# Altium PCB PCB.PcbDoc
Units mm, origin at the board's own origin, x right, y up, seen from the top; angles counter-clockwise.
Board outline 67.31 x 21.59 mm, 2 copper layers (Top Layer, Bottom Layer); 12 components, 4 nets, 20 pads, 0 vias.
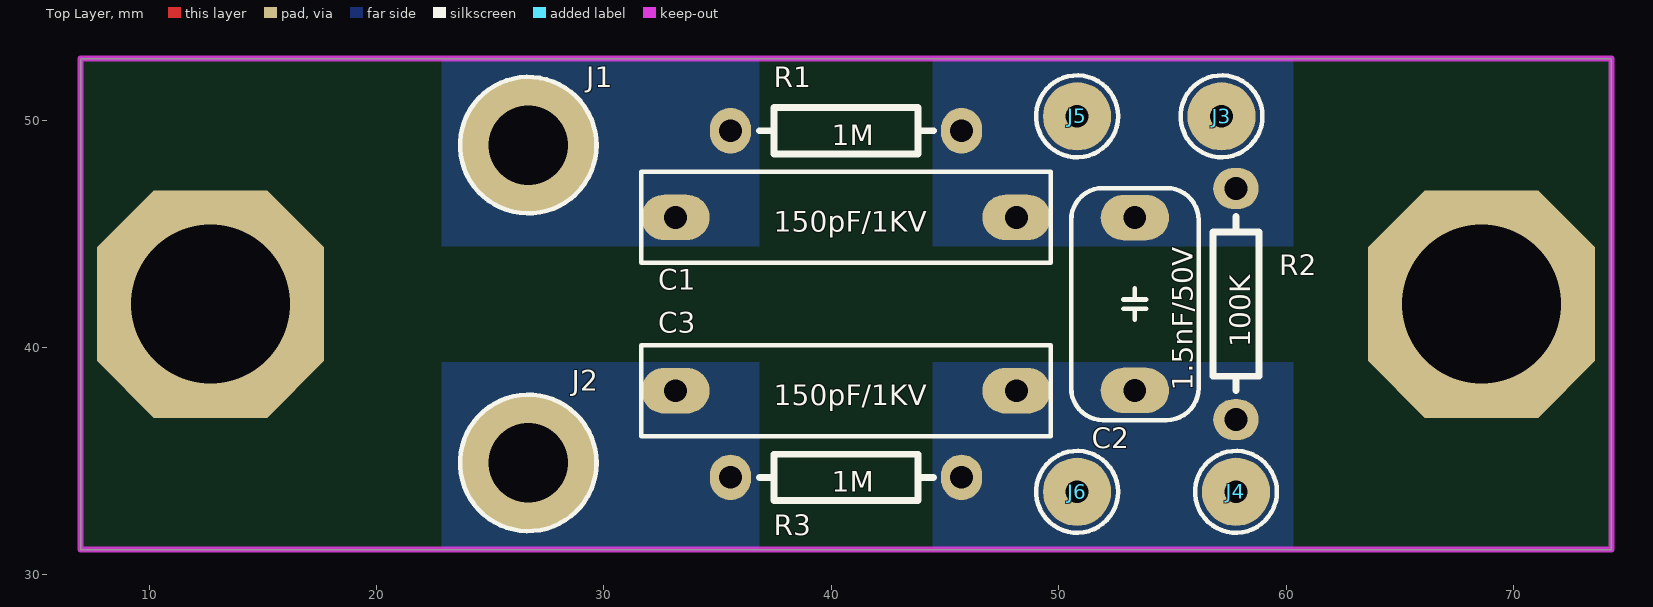
[diagram p0: Top Layer view]
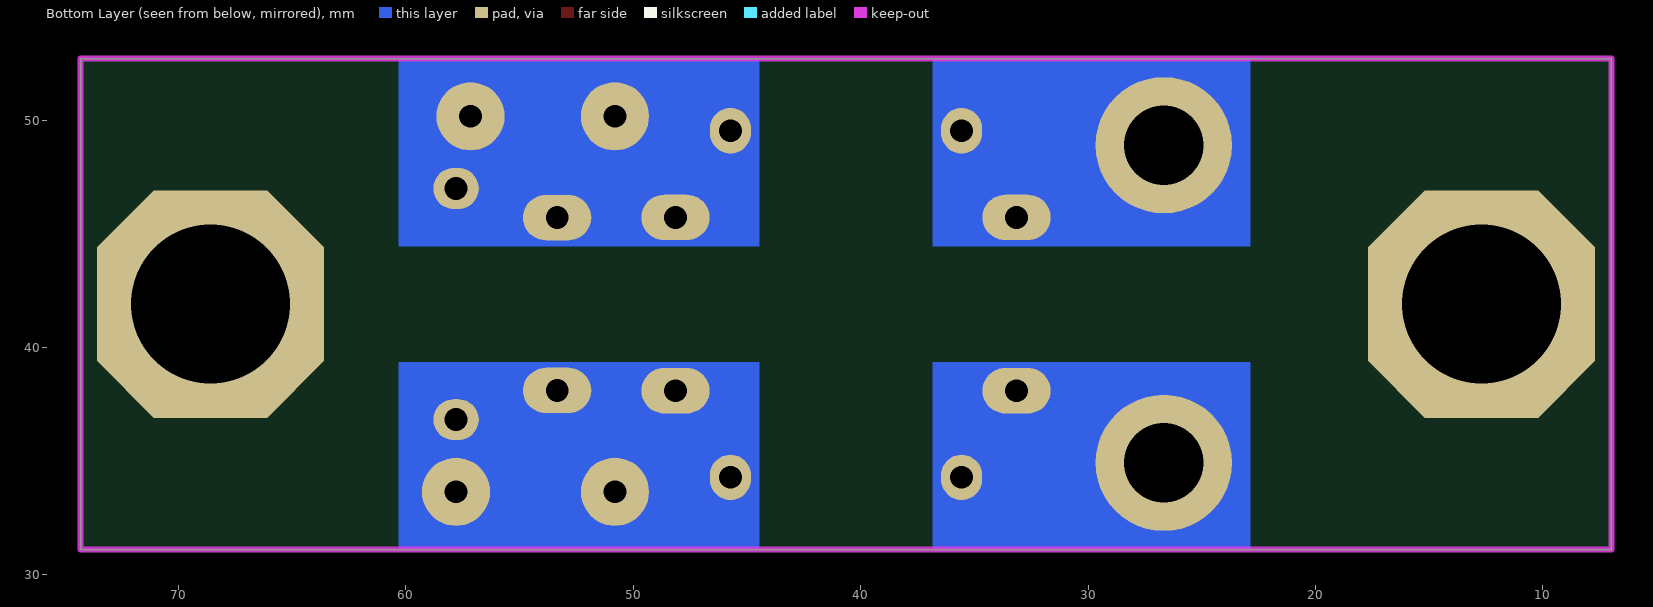
[diagram p1: Bottom Layer view, seen from below]
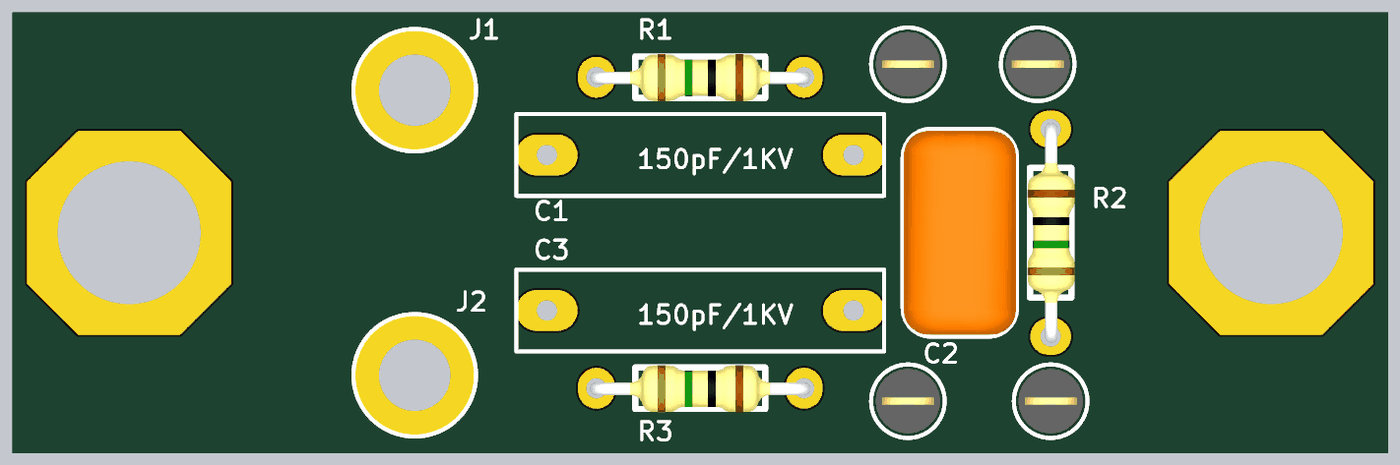
[diagram p2: 3D render of the assembled board from above, using the file's embedded part models]

## Layer stack, top to bottom
Top Solder: solder mask 0.0102, Solder Resist, Dk 3.5
Top Layer: signal copper 0.0356
Dielectric 1: dielectric 0.32, FR-4, Dk 4.8
Bottom Layer: signal copper 0.0356
Bottom Solder: solder mask 0.0102, Solder Resist, Dk 3.5

## Board outline
6.985,31.115 74.295,31.115 74.295,52.705 6.985,52.705

## Design rules (kind name [scope] priority, off if disabled: settings)
Clearance [All] p1: gap=0.254
PolygonConnect [All] p1: connectstyle=Relief reliefconductorwidth=0.254 reliefentries=4 polygonreliefangle="90 Angle" airgapwidth=0.254
RoutingVias [All] p1: holewidth=0.711 width=1.27 viastyle="Through Hole" minholewidth=0.711 minwidth=1.27 maxholewidth=0.711 maxwidth=1.27
SolderMaskExpansion [All] p1: expansion=0.102
Width [All] p1: maxlimit=1 minlimit=1 preferedwidth=1
30 further rules are at their usual default settings.

## Components (designator, comment, footprint, x,y, rotation, side; value= is the part's Value field where it differs from the comment)
C1 "150pF/1KV" THD_P15/L18/W4 40.64,45.72 r180 top
C2 "1.5nF/50V" THD_P7.6/L10/W5.5/H9 53.34,41.91 r90 top
C3 "150pF/1KV" THD_P15/L18/W4 40.64,38.1 r180 top
J1 "Connector_Socket_1Pin_Female_2Form" THD_C_BLK3 26.67,48.895 r0 top
J2 "Connector_Socket_1Pin_Female_2Form" THD_C_BLK3 26.67,34.925 r0 top
J3 "Connector_Socket_1Pin_Male_2Form" THD_C_BLK2 57.15,50.165 r0 top
J4 "Connector_Socket_1Pin_Male_2Form" THD_C_BLK2 57.785,33.655 r0 top
J5 "Connector_Socket_1Pin_Male_2Form" THD_C_BLK2 50.8,50.165 r0 top
J6 "Connector_Socket_1Pin_Male_2Form" THD_C_BLK2 50.8,33.655 r0 top
R1 "1M" THD_AXIAL0.4 40.64,49.53 r180 top
R2 "100K" THD_AXIAL0.4 57.785,41.91 r270 top
R3 "1M" THD_AXIAL0.4 40.64,34.29 r180 top

## Footprints (in the part's own frame and the unit in brackets; to place one, negate y for a bottom-side part, rotate by r counter-clockwise, add the part's x,y. Pads: shape width x height; smd on the part's side, far side on the other; paste and mask are expansions set on the pad)
THD_AXIAL0.4 [mm]
  oval 1.8x2 hole 1: 1(-5.08,0) 2(5.08,0)
  silkscreen extent -3.84,-1.02 3.81,1.02, body extent -5.38,-1.13 5.38,1.18, height 3.51
THD_C_BLK2 [mm] "Thru-hole test point loop"
  round 3 hole 1: 1(0,0)
  silkscreen extent -1.8,-1.8 1.8,1.8, body extent -1.59,-1.58 1.59,1.59, height 5.65
THD_C_BLK3 [mm] "Thru-hole test point loop"
  round 6 hole 3.5: 1(0,0)
  silkscreen extent -3,-3 3,3
THD_P7.6/L10/W5.5/H9 [mm] "Pitch(mm), Length(mm), Width(mm), Height(mm)"
  oval 2x3 hole 1 unplated mask+0.075: 1(-3.8,0) 2(3.8,0)
  silkscreen extent -5.1,-2.8 5.1,2.8, body extent -5,-2.75 5,2.75, height 9
THD_P15/L18/W4 [mm] "Pitch(mm), Length(mm), Width(mm), Height(mm)"
  oval 3x2 hole 1: 1(-7.5,0) 2(7.5,0)
  silkscreen extent -9,-2 9,2

## Part data
C1 C3: library part Capacitor_Ceramic, "Capacitor, MKT"
C2: library part Capacitor_Ceramic, "Capacitor, Polyester"
J1 J2 J3 J4 J5 J6: "Connector, Socket, 1Pin"
R1 R2 R3: library part Resistor_2Form, "Resistor, 1/4W, 5%"

## Free pads (board coordinates)
  oct 10x10 hole 7: 0(12.7,41.91) 0(68.58,41.91)

## Nets (pads, with @x,y where several pads share a name; then routed paths per layer and width w, separated by ;. In a path a pad name is that pad's centre, name@x,y a point inside that pad or via, vN(x,y) a via of type N, cw(c..) or ccw(c..) an arc to the next point about the centre after c; other vN are vias at no path point)
NetC1_1: C1.1 C2.2 J3.1 J5.1 R1.1 R2.1
NetC1_2: C1.2 J1.1 R1.2
NetC2_1: C2.1 C3.1 J4.1 J6.1 R2.2 R3.1
NetC3_2: C3.2 J2.1 R3.2

## Keep-outs
Keep-Out Layer:
  the board outline again, w0.254

## Other copper
Bottom Layer:
  rectangle net NetC1_2: 22.86,44.45 36.83,52.705
  rectangle net NetC3_2: 22.86,31.115 36.83,39.37
  rectangle net NetC1_1: 44.45,44.45 60.325,52.705
  rectangle net NetC2_1: 44.45,31.115 60.325,39.37